# EAGLE board Sturingsschakeling_PCB_v5.0 (EAGLE 9.7.0)
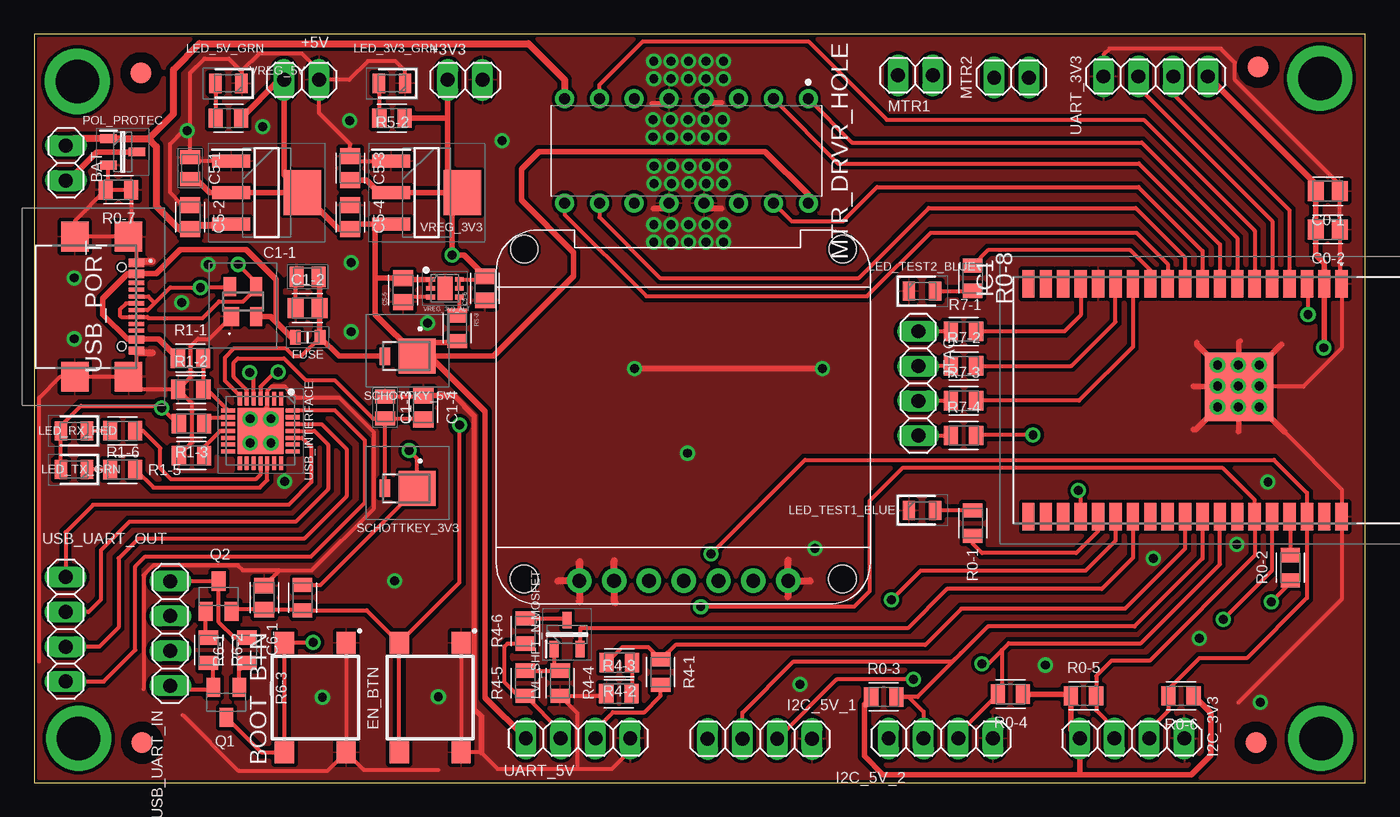
[diagram p0: board, top side]
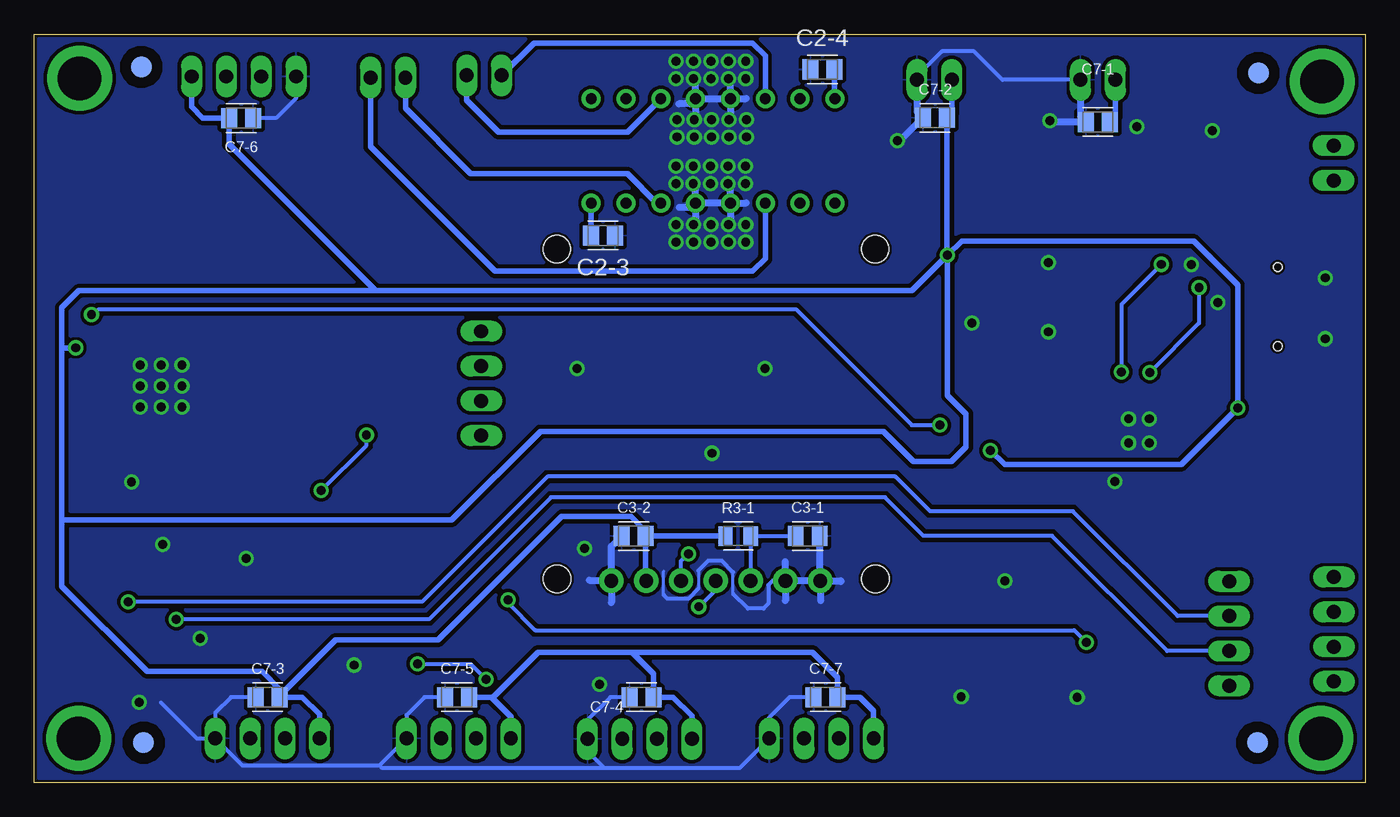
[diagram p1: board, bottom side, seen from below]

Size 97.14 x 54.64 mm. Coordinates in mm from the lower left corner, seen from the top.
Outline: 0,0 97.14,0 97.14,54.64 0,54.64 0,0
Copper layers (1*16): Top 0.035mm / dielectric 1.5mm / Bottom 0.035mm
Design rules "LPKF-S63_Design-Rules *": minimum track width 0.3mm, minimum drill 0.4mm, track to track 0.3mm, track to pad 0.25mm, pad to pad 0.25mm, via to via 0.25mm, smd to smd 0.25mm, copper to edge 0.2mm, drill to drill 0.3mm, minimum pad ring 0.1mm, minimum via ring 0.1mm, stop-mask expansion 4mil, vias tented up to drill 0mil, thermal gap 10mil

## Footprints (pad centres in the part's own frame; a part is rotated, then mirrored left to right if it is on the bottom)
1X02 = drill 1.016 long: 1 -1.27,0; 2 1.27,0
B3FS-1000P = smd 1.6 x 1.4: 1 4,-2.25; 2 -4,-2.25; 3 4,2.25; 4 -4,2.25
CAPC2012X110 = smd 1.165 x 1.465: 1 -0.875,0; 2 0.875,0
CAPC2012X145N = smd 1.02 x 1.47: 1 -0.8,0; 2 0.8,0
FID_060_P = smd 1.524 x 1.524 bottom: FIDB 0,0 | smd 1.524 x 1.524: FIDT 0,0
FUSC1608X100N = smd 0.77 x 1.07: 1 -0.9,0; 2 0.9,0
1X04 = drill 1.016 long: 1 -3.81,0; 2 -1.27,0; 3 1.27,0; 4 3.81,0
ESP32WROVER = smd 2 x 0.9: 1 -8.5,8.26; 2 -8.5,6.99; 3 -8.5,5.72; 4 -8.5,4.45; 5 -8.5,3.18; 6 -8.5,1.91; 7 -8.5,0.64; 8 -8.5,-0.63; 9 -8.5,-1.9; 10 -8.5,-3.17; 11 -8.5,-4.44; 12 -8.5,-5.71; 13 -8.5,-6.98; 14 -8.5,-8.25; 15 -8.5,-9.52; 16 -8.5,-10.79; 17 -8.5,-12.06; 18 -8.5,-13.33; 19 -8.5,-14.6; 20 8.5,-14.6; 21 8.5,-13.33; 22 8.5,-12.06; 23 8.5,-10.79; 24 8.5,-9.52; 25 8.5,-8.25; 26 8.5,-6.98; 27 8.5,-5.71; 28 8.5,-4.44; 29 8.5,-3.17; 30 8.5,-1.9; 31 8.5,-0.63; 32 8.5,0.64; 33 8.5,1.91; 34 8.5,3.18; 35 8.5,4.45; 36 8.5,5.72; 37 8.5,6.99; 38 8.5,8.26 | smd 5 x 5: 39 -1,0.76
LEDC2012X80N = smd 0.9 x 1.4: 1 -0.95,0; 2 0.95,0
SOT96P240X110-3N = smd 1.2 x 0.65: 1 -1.05,0.96; 2 -1.05,-0.96; 3 1.05,0
BEAGLEBONEBLACK_MOUNTING_HOLE = drill 3.175 pad 4.445: P$1 0,0
DIP762W53P254L1980H508Q16B = drill 0.789 pad 1.389: 1 -3.81,8.89; 2 -3.81,6.35; 3 -3.81,3.81; 4 -3.81,1.27; 5 -3.81,-1.27; 6 -3.81,-3.81; 7 -3.81,-6.35; 8 -3.81,-8.89; 9 3.81,-8.89; 10 3.81,-6.35; 11 3.81,-3.81; 12 3.81,-1.27; 13 3.81,1.27; 14 3.81,3.81; 15 3.81,6.35; 16 3.81,8.89
OLED096_SPI/I2C = drill 1 pad 1.778: CS/GND 22.5,26.87; D0/SCL 12.34,26.87; D1/SDA 14.88,26.87; DC/GND 19.96,26.87; GND 7.26,26.87; RES/RST 17.42,26.87; VCC 9.8,26.87 | hole 2: 3.275,2.66; 26.515,2.66; 26.54,26.722; 3.3,26.722
SOT23-BEC = smd 1 x 1.4: B -0.95,-1.1; C 0,1.1; E 0.95,-1.1
RESC2012X65 = smd 1.031 x 1.42: 1 -0.919,0; 2 0.919,0
SS1P3LM384A = smd 2.67 x 2.54: 1 0,0 | smd 0.762 x 1.27: 2 2.351,0
SP0503BAHTG = smd 1.1 x 1.4: 1 -0.85,-1.1 | smd 0.9 x 1.4: 2 0.95,-1.1; 3 0.95,1.1; 4 -0.95,1.1
QFN50P500X500X80-29N = smd 1 x 0.3: 1 -2.35,1.5; 2 -2.35,1; 3 -2.35,0.5; 4 -2.35,0; 5 -2.35,-0.5; 6 -2.35,-1; 7 -2.35,-1.5; 15 2.35,-1.5; 16 2.35,-1; 17 2.35,-0.5; 18 2.35,0; 19 2.35,0.5; 20 2.35,1; 21 2.35,1.5 | smd 0.3 x 1: 8 -1.5,-2.35; 9 -1,-2.35; 10 -0.5,-2.35; 11 0,-2.35; 12 0.5,-2.35; 13 1,-2.35; 14 1.5,-2.35; 22 1.5,2.35; 23 1,2.35; 24 0.5,2.35; 25 0,2.35; 26 -0.5,2.35; 27 -1,2.35; 28 -1.5,2.35 | smd 3.35 x 3.35: 29 0,0
USB4110GFA = smd 0.3 x 1.15: A1 -3.35,3.678; A4 -2.55,3.678; A5 -1.25,3.678; A6 -0.25,3.678; A7 0.25,3.678; A8 1.25,3.678; A9 2.55,3.678; A12 3.35,3.678; B1 3.05,3.678; B4 2.25,3.678; B5 1.75,3.678; B6 0.75,3.678; B7 -0.75,3.678; B8 -1.75,3.678; B9 -2.25,3.678; B12 -3.05,3.678 | smd 2.18 x 2: MP1 -5.11,-0.827; MP2 5.11,-0.827; MP3 -5.11,3.103; MP4 5.11,3.103 | hole 0.65: -2.89,2.603; 2.89,2.603
SOT230P700X180-4N = smd 2.75 x 0.95: 1 -2.6,2.3; 2 -2.6,0; 3 -2.6,-2.3 | smd 2.75 x 3.25: 4 2.6,0
SON65P200X200X80-7N = smd 0.65 x 0.35: 1 -1.05,0.65; 2 -1.05,0; 3 -1.05,-0.65; 4 1.05,-0.65; 5 1.05,0; 6 1.05,0.65 | smd 1.1 x 1.7: 7 0,0

## Placement (x,y rotation side)
+3V3  PINHD-1X2  [1X02]  31.45,51.31 0 top
+5V  PINHD-1X2  [1X02]  19.51,51.31 0 top
BAT  PINHD-1X2  [1X02]  2.31,45.24 270 top
BOOT_BTN  B3FS-1000P  [B3FS-1000P]  20.51,6.22 90 top
C0-1  22uF  [CAPC2012X110]  94.41,43.18 180 top
C0-2  100nF  [CAPC2012X110]  94.41,40.39 180 top
C1-1  4.7uF_16V  [CAPC2012X145N]  19.94,36.93 0 top
C1-2  100nF  [CAPC2012X110]  19.94,34.65 0 top
C1-3  4.7uF_16V  [CAPC2012X145N]  25.6,27.38 270 top
C1-4  100nF  [CAPC2012X110]  28.4,27.38 270 top
C2-3  100nF  [CAPC2012X110]  55.63,39.95 180 bottom
C2-4  1uF  [CAPC2012X110]  39.62,52.07 0 bottom
C3-1  100nF  [CAPC2012X110]  40.69,18.01 0 bottom
C3-2  100nF  [CAPC2012X110]  53.39,18.01 0 bottom
C5-1  4.7uF_16V  [CAPC2012X145N]  11.38,44.86 270 top
C5-2  1uF  [CAPC2012X110]  11.38,41.3 270 top
C5-3  4.7uF  [CAPC2012X110]  23.06,44.86 270 top
C5-4  1uF  [CAPC2012X110]  23.06,41.3 270 top
C5-5  1uF  [CAPC2012X110]  26.92,35.97 90 top
C5-6  10uF  [CAPC2012X110]  32.89,36.09 90 top
C6-1  1uF  [CAPC2012X110]  16.79,13.51 270 top
C7-1  1uF  [CAPC2012X110]  19.51,48.23 0 bottom
C7-2  1uF  [CAPC2012X110]  31.39,48.54 0 bottom
C7-3  1uF  [CAPC2012X110]  80.09,6.25 0 bottom
C7-4  1uF  [CAPC2012X110]  52.83,6.25 0 bottom
C7-5  1uF  [CAPC2012X110]  66.29,6.25 0 bottom
C7-6  1uF  [CAPC2012X110]  82.04,48.51 180 bottom
C7-7  1uF  [CAPC2012X110]  39.38,6.25 0 bottom
EN_BTN  B3FS-1000P  [B3FS-1000P]  28.89,6.22 90 top
FD1  FID_60MIL_P  [FID_060_P]  7.8,51.82 0 top
FD2  FID_60MIL_P  [FID_060_P]  89.33,52.25 0 top
FD3  FID_60MIL_P  [FID_060_P]  89.15,2.92 0 top
FD4  FID_60MIL_P  [FID_060_P]  7.87,2.92 0 top
FUSE  MF-FSMF050X-2  [FUSC1608X100N]  19.96,32.51 180 top
I2C_3V3  PINHD-1X4  [1X04]  80.11,3.23 0 top
I2C_5V_1  PINHD-1X4  [1X04]  52.96,3.2 0 top
I2C_5V_2  PINHD-1X4  [1X04]  66.17,3.23 0 top
IC1  ESP32-WROVER  [ESP32WROVER]  87.16,27.92 270 top
JTAG  PINHD-1X4  [1X04]  64.52,29.15 270 top
LED_3V3_GRN  150080RS75000  [LEDC2012X80N]  26.11,51.05 180 top
LED_5V_GRN  150080RS75000  [LEDC2012X80N]  14.17,51.05 180 top
LED_RX_RED  150080RS75000  [LEDC2012X80N]  2.9,25.68 180 top
LED_TEST1_BLUE  150080RS75000  [LEDC2012X80N]  64.79,19.89 0 top
LED_TEST2_BLUE  150080RS75000  [LEDC2012X80N]  64.79,35.89 0 top
LED_TX_GRN  150080RS75000  [LEDC2012X80N]  2.9,22.87 180 top
LVL_SHFT_N-MOSFET  DMG3414U  [SOT96P240X110-3N]  38.89,10.82 90 top
MGT1  BEAGLEBONEBLACK_MOUNTING_HOLE  [BEAGLEBONEBLACK_MOUNTING_HOLE]  3.14,51.2 0 top
MGT2  BEAGLEBONEBLACK_MOUNTING_HOLE  [BEAGLEBONEBLACK_MOUNTING_HOLE]  93.9,3.24 0 top
MGT3  BEAGLEBONEBLACK_MOUNTING_HOLE  [BEAGLEBONEBLACK_MOUNTING_HOLE]  3.24,3.24 0 top
MGT4  BEAGLEBONEBLACK_MOUNTING_HOLE  [BEAGLEBONEBLACK_MOUNTING_HOLE]  93.83,51.43 0 top
MTR1  PINHD-1X2  [1X02]  64.31,51.64 180 top
MTR2  PINHD-1X2  [1X02]  71.32,51.48 180 top
MTR_DRVR_HOLE  SN754410  [DIP762W53P254L1980H508Q16B]  47.6,46.13 270 top
OLED  OLED096_SPI/I2C  [OLED096_SPI/I2C]  62.28,41.61 180 top
POL_PROTEC  DMG3414U  [SOT96P240X110-3N]  6.45,46.05 0 top
Q1  BC817-16SMD  [SOT23-BEC]  14.02,5.87 180 top
Q2  BC817-16SMD  [SOT23-BEC]  13.46,13.61 0 top
R0-1  1kΩ  [RESC2012X65]  68.49,18.95 270 top
R0-2  499Ω  [RESC2012X65]  91.67,15.7 90 top
R0-3  4k7Ω  [RESC2012X65]  62,6.27 0 top
R0-4  4k7Ω  [RESC2012X65]  71.25,6.47 180 top
R0-5  2k4Ω  [RESC2012X65]  76.58,6.34 0 top
R0-6  2k4Ω  [RESC2012X65]  83.69,6.34 180 top
R0-7  1kΩ  [RESC2012X65]  6.14,43.28 180 top
R0-8  1kΩ  [RESC2012X65]  68.49,36.83 270 top
R1-1  22k1Ω  [RESC2012X65]  11.4,30.99 0 top
R1-2  47k5Ω  [RESC2012X65]  11.43,28.71 0 top
R1-3  1kΩ  [RESC2012X65]  11.48,26.22 180 top
R1-4  10kΩ  [RESC2012X65]  11.48,23.88 0 top
R1-5  1kΩ  [RESC2012X65]  6.45,22.87 0 top
R1-6  1kΩ  [RESC2012X65]  6.45,25.68 0 top
R3-1  10kΩ  [RESC2012X65]  45.77,18.01 0 bottom
R4-1  1kΩ  [RESC2012X65]  45.72,8.08 270 top
R4-2  1kΩ  [RESC2012X65]  42.7,8.77 180 top
R4-3  1kΩ  [RESC2012X65]  42.67,6.5 0 top
R4-4  10kΩ  [RESC2012X65]  38.38,7.26 270 top
R4-5  4k7Ω  [RESC2012X65]  35.84,7.26 90 top
R4-6  10kΩ  [RESC2012X65]  35.84,11.07 90 top
R5-1  1kΩ  [RESC2012X65]  14.17,48.51 180 top
R5-2  1kΩ  [RESC2012X65]  26.11,48.51 180 top
R5-3  100kΩ  [RESC2012X65]  30.86,33.17 270 top
R6-1  10kΩ  [RESC2012X65]  15.52,9.68 90 top
R6-2  10kΩ  [RESC2012X65]  12.73,9.68 270 top
R6-3  10kΩ  [RESC2012X65]  19.58,13.51 90 top
R7-1  100Ω  [RESC2012X65]  67.83,32.94 0 top
R7-2  100Ω  [RESC2012X65]  67.83,30.42 0 top
R7-3  100Ω  [RESC2012X65]  67.83,27.89 0 top
R7-4  100Ω  [RESC2012X65]  67.83,25.35 0 top
SCHOTTKEY_3V3  SS1P3L-M3_84A  [SS1P3LM384A]  27.94,21.49 180 top
SCHOTTKY_5V  SS1P3L-M3_84A  [SS1P3LM384A]  27.94,31.14 180 top
TVS_DIODE_ESD_P  SP0503BAHTG  [SP0503BAHTG]  15.24,35.13 0 top
UART_3V3  PINHD-1X4  [1X04]  81.85,51.56 180 top
UART_5V  PINHD-1X4  [1X04]  39.69,3.23 0 top
USB_INTERFACE  CP2102N-A02-GQFN28R  [QFN50P500X500X80-29N]  16.51,25.68 270 top
USB_PORT  USB4110-GF-A  [USB4110GFA]  3.78,34.75 270 top
USB_UART_IN  PINHD-1X4  [1X04]  9.93,10.9 90 top
USB_UART_OUT  PINHD-1X4  [1X04]  2.29,11.2 270 top
VREG_3V3  LDL1117S33R  [SOT230P700X180-4N]  28.65,43.08 0 top
VREG_3V3_ALT  NCP187AMT330TAG  [SON65P200X200X80-7N]  29.97,36.09 0 top
VREG_5V  LDL1117S50R  [SOT230P700X180-4N]  16.97,43.08 0 top

## Library data of the parts
+3V3 +5V BAT I2C_3V3 I2C_5V_1 I2C_5V_2 JTAG MTR1 MTR2 UART_3V3 UART_5V USB_UART_IN USB_UART_OUT = Connector; CATEGORY: CONNECTOR; SUB-CATEGORY: PIN-HEADER
BOOT_BTN EN_BTN = B3FS-1000P; ARROW_PART_NUMBER: B3FS-1000P; ARROW_PRICE-STOCK: https://www.arrow.com/en/products/b3fs-1000p/omron?region=nac; DESCRIPTION: Switch Tact,6x6mm,flat act,gen purp,tape Plunger Tactile Switch, SPST-NO 0.05 A@ 24 V dc 0.5mm; HEIGHT: mm; MANUFACTURER_NAME: Omron Electronics; MANUFACTURER_PART_NUMBER: B3FS-1000P; MOUSER_PART_NUMBER: 653-B3FS-1000P; MOUSER_PRICE-STOCK: https://www.mouser.co.uk/ProductDetail/Omron-Electronics/B3FS-1000P?qs=ImaqFqjHA4k6odVF2%2FXWpQ%3D%3D
C0-1 C0-2 C1-2 C1-4 C2-3 C2-4 C3-1 C3-2 C5-2-C5-6 C6-1 C7-1-C7-7 = Capacitor; CATEGORY: Capacitor
C1-1 C1-3 C5-1 = CC0805ZKY5V7BB475; ARROW_PART_NUMBER: CC0805ZKY5V7BB475; ARROW_PRICE-STOCK: https://www.arrow.com/en/products/cc0805zky5v7bb475/yageo; DESCRIPTION: YAGEO - CC0805ZKY5V7BB475 - SMD Multilayer Ceramic Capacitor, 4.7 F, 16 V, 0805 [2012 Metric], +80%, -20%, Y5V, CC Series; HEIGHT: 1.45mm; MANUFACTURER_NAME: KEMET; MANUFACTURER_PART_NUMBER: CC0805ZKY5V7BB475; MOUSER_PART_NUMBER: 603-CC805ZKY5V7BB475; MOUSER_PRICE-STOCK: https://www.mouser.co.uk/ProductDetail/Yageo/CC0805ZKY5V7BB475?qs=7s%252B3O6pAiyA4wtTM471wUA%3D%3D
FD1-FD4 = Fiducial
FUSE = MF-FSMF050X-2; ARROW_PART_NUMBER: MF-FSMF050X-2; ARROW_PRICE-STOCK: https://www.arrow.com/en/products/mf-fsmf050x-2/bourns?region=nac; DESCRIPTION: 0603 PTC Resettable Fuses, 6V, 500mA Bourns 0.5A Surface Mount Resettable Fuse, 6 V; HEIGHT: 1mm; MANUFACTURER_NAME: Bourns; MANUFACTURER_PART_NUMBER: MF-FSMF050X-2; MOUSER_PART_NUMBER: 652-MFFSMF050X-2; MOUSER_PRICE-STOCK: https://www.mouser.co.uk/ProductDetail/Bourns/MF-FSMF050X-2?qs=3QkGRBNOvbrZekaW8Gqm4A%3D%3D
IC1 = ESP32-WROVER; DESCRIPTION: WiFi Modules (802.11) SMD Module, ESP32-D0WDQ6, 64Mbits PSRAM, 32Mbits SPI flash, PCB Antenna; HEIGHT: 3mm; MANUFACTURER_NAME: Espressif Systems; MANUFACTURER_PART_NUMBER: ESP32-WROVER; MOUSER_PART_NUMBER: 356-ESP32-WROVER
LED_3V3_GRN LED_5V_GRN LED_RX_RED LED_TEST1_BLUE LED_TEST2_BLUE LED_TX_GRN = 150080RS75000; DESCRIPTION: LED,Wurth Elektronik,150080RS75000 Wurth Elektronik 150080RS75000, WL-SMCW Series Red LED, 625 nm 2012 (0805) Clear, Rectangle Lens SMD package; HEIGHT: 0.8mm; MANUFACTURER_NAME: Wurth Elektronik; MANUFACTURER_PART_NUMBER: 150080RS75000; MOUSER_PART_NUMBER: 710-150080RS75000; MOUSER_PRICE-STOCK: https://www.mouser.co.uk/ProductDetail/Wurth-Elektronik/150080RS75000?qs=LlUlMxKIyB2jdCo7bnfgew%3D%3D
LVL_SHFT_N-MOSFET POL_PROTEC = DMG3414U; DESCRIPTION: DIODES INC. - DMG3414U - MOSFET, N CH, W DIODE, 20V, 4.2A, SOT23; HEIGHT: 1.1mm; MANUFACTURER_NAME: Diodes Inc.; MANUFACTURER_PART_NUMBER: DMG3414U; MOUSER_PART_NUMBER: N/A; MOUSER_PRICE-STOCK: https://www.mouser.co.uk/ProductDetail/Diodes-Incorporated/DMG3414U?qs=Ledwo0gu0jiKJ4xsXSUnyQ%3D%3D
MGT1-MGT4 = BeagleBone_Black_Wireless
MTR_DRVR_HOLE = IC_Power-Management; CATEGORY: IC_Power-Management; DESCRIPTION: Quadruple Half-H Driver; MANUFACTURER: TEXAS INSTRUMENTS; MPN: SN754410; OPERATING_TEMP: -40°C to 150°C (TJ); PART_STATUS: Active; ROHS_COMPLIANT: ROHS3 Compliant; SERIES: SN754; SUB_CATEGORY: Motor Driver
OLED = OLED096
Q1 Q2 = transistor-npn
R0-1-R0-8 R1-1-R1-6 R3-1 R4-1-R4-6 R5-1-R5-3 R6-1-R6-3 R7-1-R7-4 = Resistor; CATEGORY: Resistor; SUB-CATEGORY: Fixed
SCHOTTKEY_3V3 SCHOTTKY_5V = SS1P3L-M3_84A; ARROW_PART_NUMBER: SS1P3L-M3/84A; ARROW_PRICE-STOCK: https://www.arrow.com/en/products/ss1p3l-m384a/vishay?region=nac; DESCRIPTION: Schottky Diodes & Rectifiers 30volt 1.0amp Low VF High Current Density Surface Mount Schottky Barrier Rectifiers; HEIGHT: 1.15mm; MANUFACTURER_NAME: Vishay; MANUFACTURER_PART_NUMBER: SS1P3L-M3/84A; MOUSER_PART_NUMBER: 625-SS1P3L-M3/84A; MOUSER_PRICE-STOCK: https://www.mouser.co.uk/ProductDetail/Vishay-General-Semiconductor/SS1P3L-M3-84A?qs=HSPD0Bff7iZtYrbeCvAZDQ%3D%3D
TVS_DIODE_ESD_P = SP0503BAHTG; ARROW_PART_NUMBER: SP0503BAHTG; ARROW_PRICE-STOCK: https://www.arrow.com/en/products/sp0503bahtg/littelfuse?region=europe; DESCRIPTION: ESD Suppressors / TVS Diodes TVS AVAL DIODE SMT; HEIGHT: 1.22mm; MANUFACTURER_NAME: LITTELFUSE; MANUFACTURER_PART_NUMBER: SP0503BAHTG; MOUSER_PART_NUMBER: 576-SP0503BAHTG; MOUSER_PRICE-STOCK: https://www.mouser.co.uk/ProductDetail/Littelfuse/SP0503BAHTG?qs=uD%2FdkN7XIa0NTYXwHdELYA%3D%3D
USB_INTERFACE = CP2102N-A02-GQFN28R; ARROW_PART_NUMBER: CP2102N-A02-GQFN28R; ARROW_PRICE-STOCK: https://www.arrow.com/en/products/cp2102n-a02-gqfn28r/silicon-labs?region=nac; DESCRIPTION: USB Interface IC USB to UART bridge - QFN28; HEIGHT: 0.8mm; MANUFACTURER_NAME: Silicon Labs; MANUFACTURER_PART_NUMBER: CP2102N-A02-GQFN28R; MOUSER_PART_NUMBER: 634-CP2102NA02QFN28R; MOUSER_PRICE-STOCK: https://www.mouser.co.uk/ProductDetail/Silicon-Labs/CP2102N-A02-GQFN28R?qs=u16ybLDytRag4qKvSH3fTw%3D%3D
USB_PORT = USB4110-GF-A; DESCRIPTION: CONN USB 2.0 TYPE-C R/A SMT; HEIGHT: 3.26mm; MANUFACTURER_NAME: GCT (GLOBAL CONNECTOR TECHNOLOGY); MANUFACTURER_PART_NUMBER: USB4110-GF-A; MOUSER_PART_NUMBER: 640-USB4110-GF-A; MOUSER_PRICE-STOCK: https://www.mouser.co.uk/ProductDetail/GCT/USB4110-GF-A?qs=KUoIvG%2F9IlYiZvIXQjyJeA%3D%3D
VREG_3V3 = LDL1117S33R; ARROW_PART_NUMBER: LDL1117S33R; ARROW_PRICE-STOCK: https://www.arrow.com/en/products/ldl1117s33r/stmicroelectronics?region=nac; DESCRIPTION: STMICROELECTRONICS - LDL1117S33R - LDO, FIXED, 3.3V, 1.2A, SOT-223-3; HEIGHT: 1.8mm; MANUFACTURER_NAME: STMicroelectronics; MANUFACTURER_PART_NUMBER: LDL1117S33R; MOUSER_PART_NUMBER: 511-LDL1117S33R; MOUSER_PRICE-STOCK: https://www.mouser.co.uk/ProductDetail/STMicroelectronics/LDL1117S33R?qs=AQlKX63v8Rt9Bf6AWSrbFg%3D%3D
VREG_3V3_ALT = NCP187AMT330TAG; ARROW_PART_NUMBER: NCP187AMT330TAG; ARROW_PRICE-STOCK: https://www.arrow.com/en/products/ncp187amt330tag/on-semiconductor?region=nac; DESCRIPTION: LDO Voltage Regulators 1.2A 3.3V Active discharge; HEIGHT: 0.8mm; MANUFACTURER_NAME: onsemi; MANUFACTURER_PART_NUMBER: NCP187AMT330TAG; MOUSER_PART_NUMBER: 863-NCP187AMT330TAG; MOUSER_PRICE-STOCK: https://www.mouser.co.uk/ProductDetail/ON-Semiconductor/NCP187AMT330TAG?qs=%252B6g0mu59x7JOII%252BWk4iw4Q%3D%3D
VREG_5V = LDL1117S50R; ARROW_PART_NUMBER: LDL1117S50R; ARROW_PRICE-STOCK: https://www.arrow.com/en/products/ldl1117s50r/stmicroelectronics?region=nac; DESCRIPTION: STMICROELECTRONICS - LDL1117S50R - LDO, FIXED, 5V, 1.2A, SOT-223-3; HEIGHT: 1.8mm; MANUFACTURER_NAME: STMicroelectronics; MANUFACTURER_PART_NUMBER: LDL1117S50R; MOUSER_PART_NUMBER: 511-LDL1117S50R; MOUSER_PRICE-STOCK: https://www.mouser.co.uk/ProductDetail/STMicroelectronics/LDL1117S50R?qs=AQlKX63v8RsuN9BQFiVf%2Fg%3D%3D

## Nets
3V3_USB: C1-3.2 C1-4.2 SCHOTTKEY_3V3.2 USB_INTERFACE.6
5V_OUT: LVL_SHFT_N-MOSFET.3 R4-6.2
5V_USB: C1-1.2 C1-2.2 FUSE.1 SCHOTTKY_5V.2 USB_INTERFACE.7
+3.3V: +3V3.1 C0-1.2 C0-2.2 C3-2.2 C5-3.2 C5-6.2 C7-2.2 C7-3.2 C7-6.2 I2C_3V3.1 IC1.2 LED_RX_RED.2 LED_TX_GRN.2 OLED.VCC R0-3.1 R0-4.1 R0-5.1 R0-6.1 R1-3.2 R3-1.1 R5-2.1 R6-3.2 SCHOTTKEY_3V3.1 UART_3V3.1 VREG_3V3.2 VREG_3V3.4 VREG_3V3_ALT.5 VREG_3V3_ALT.6
+5V: +5V.1 C2-3.2 C5-1.2 C5-4.2 C5-5.2 C7-1.2 C7-4.2 C7-5.2 C7-7.2 I2C_5V_1.1 I2C_5V_2.1 MTR_DRVR_HOLE.16 R5-1.1 R5-3.2 SCHOTTKY_5V.1 UART_5V.1 VREG_3V3.3 VREG_3V3_ALT.1 VREG_3V3_ALT.2 VREG_5V.2 VREG_5V.4
BOOT: BOOT_BTN.3 BOOT_BTN.4 IC1.25 Q1.C
D+: TVS_DIODE_ESD_P.3 USB_INTERFACE.4 USB_PORT.A6 USB_PORT.B6
D-: TVS_DIODE_ESD_P.4 USB_INTERFACE.5 USB_PORT.A7 USB_PORT.B7
DTR_IN: Q1.E R6-2.2 USB_UART_IN.1
DTR_OUT: USB_INTERFACE.28 USB_UART_OUT.4
EN: C6-1.2 EN_BTN.3 EN_BTN.4 IC1.3 Q2.E R6-3.1
GND: +3V3.2 +5V.2 BOOT_BTN.1 BOOT_BTN.2 C0-1.1 C0-2.1 C1-1.1 C1-2.1 C1-3.1 C1-4.1 C2-3.1 C2-4.1 C3-1.2 C3-2.1 C5-1.1 C5-2.1 C5-3.1 C5-4.1 C5-5.1 C5-6.1 C6-1.1 C7-1.1 C7-2.1 C7-3.1 C7-4.1 C7-5.1 C7-6.1 C7-7.1 EN_BTN.1 EN_BTN.2 I2C_3V3.4 I2C_5V_1.4 I2C_5V_2.4 IC1.1 IC1.15 IC1.38 IC1.39 LED_3V3_GRN.1 LED_5V_GRN.1 LED_TEST1_BLUE.1 LED_TEST2_BLUE.1 MTR_DRVR_HOLE.4 MTR_DRVR_HOLE.5 MTR_DRVR_HOLE.12 MTR_DRVR_HOLE.13 OLED.CS/GND OLED.DC/GND OLED.GND POL_PROTEC.2 R0-7.1 R0-7.2 R1-2.1 R1-4.1 R4-3.1 R4-4.2 TVS_DIODE_ESD_P.1 UART_3V3.4 UART_5V.4 USB_INTERFACE.3 USB_INTERFACE.29 USB_PORT.A1 USB_PORT.A12 USB_PORT.B1 USB_PORT.B12 USB_PORT.MP1 USB_PORT.MP2 USB_PORT.MP3 USB_PORT.MP4 VREG_3V3.1 VREG_3V3_ALT.3 VREG_3V3_ALT.7 VREG_5V.1
GND_BAT: BAT.2 POL_PROTEC.3
LED_RX: R1-6.2 USB_INTERFACE.18
LED_TEST: IC1.24 R0-1.2
LED_TX: R1-5.2 USB_INTERFACE.19
MTCK: IC1.16 R7-1.2
MTDI: IC1.14 R7-2.2
MTDO: IC1.23 R7-4.2
MTMS: IC1.13 R7-3.2
MTR1_1,2EN: IC1.7 MTR_DRVR_HOLE.1
MTR1_1A: IC1.8 MTR_DRVR_HOLE.2
MTR1_2A: IC1.6 MTR_DRVR_HOLE.7
MTR1_OUT1Y: MTR1.1 MTR_DRVR_HOLE.3
MTR1_OUT2Y: MTR1.2 MTR_DRVR_HOLE.6
MTR2_3,4EN: IC1.11 MTR_DRVR_HOLE.9
MTR2_3A: IC1.10 MTR_DRVR_HOLE.10
MTR2_4A: IC1.9 MTR_DRVR_HOLE.15
MTR2_OUT3Y: MTR2.1 MTR_DRVR_HOLE.11
MTR2_OUT4Y: MTR2.2 MTR_DRVR_HOLE.14
N$2: IC1.12 R0-8.1
N$3: LED_TEST2_BLUE.2 R0-8.2
N$6: JTAG.1 R7-1.1
N$7: LED_3V3_GRN.2 R5-2.2
N$8: LED_5V_GRN.2 R5-1.2
N$10: LED_TEST1_BLUE.2 R0-1.1
N$11: JTAG.2 R7-2.1
N$13: R5-3.1 VREG_3V3_ALT.4
N$14: JTAG.3 R7-3.1
N$15: JTAG.4 R7-4.1
N$18: Q1.B R6-1.1
N$19: Q2.B R6-2.1
N$34: LVL_SHFT_N-MOSFET.1 R4-4.1 R4-5.2
N$35: R4-2.1 R4-3.2
N$38: IC1.35 R0-2.2
N$40: LED_TX_GRN.1 R1-5.1
N$41: LED_RX_RED.1 R1-6.1
RES: C3-1.1 OLED.RES/RST R3-1.2
RSTB: R1-3.1 USB_INTERFACE.9
RTS_IN: Q2.C R6-1.2 USB_UART_IN.4
RTS_OUT: USB_INTERFACE.24 USB_UART_OUT.1
RX_3V3: IC1.4 UART_3V3.2
RX_5V_A: IC1.26 LVL_SHFT_N-MOSFET.2
RX_5V_B: R4-1.2 UART_5V.3
RX_USB: USB_INTERFACE.26 USB_UART_OUT.3
RX_USB_IN: IC1.34 USB_UART_IN.2
SCL_3V3: I2C_3V3.3 IC1.36 OLED.D0/SCL R0-6.2
SCL_5V: I2C_5V_1.3 I2C_5V_2.3 IC1.31 R0-4.2
SDA_3V3: I2C_3V3.2 IC1.33 OLED.D1/SDA R0-5.2
SDA_5V: I2C_5V_1.2 I2C_5V_2.2 IC1.30 R0-3.2
SUSPENDB: R1-4.2 USB_INTERFACE.11
TX_3V3: IC1.5 UART_3V3.3
TX_5V_A: IC1.29 R4-1.1 R4-2.2
TX_5V_B: R4-5.1 R4-6.1 UART_5V.2
TX_USB: USB_INTERFACE.25 USB_UART_OUT.2
TX_USB_IN: R0-2.1 USB_UART_IN.3
V_BAT: BAT.1 C2-4.2 C5-2.2 MTR_DRVR_HOLE.8 POL_PROTEC.1 VREG_5V.3
VBUS_INT: R1-1.2 R1-2.2 USB_INTERFACE.8
VBUS_USB: FUSE.2 R1-1.1 TVS_DIODE_ESD_P.2 USB_PORT.A4 USB_PORT.A9 USB_PORT.B4 USB_PORT.B9

## Tracks (layer width: path | path; a pad name or v marks a point on that pad's centre or on a via)
3V3_USB
  Top 0.3: SCHOTTKEY_3V3.2 25.6,21.5 C1-3.2 | C1-3.2 28.32,26.58 C1-4.2 | USB_INTERFACE.6 15.51,28.67 14.55,29.62 14.55,30.68 14.85,30.98 18.22,30.98 19.81,29.39 21.92,29.39 24.73,26.58 C1-3.2
5V_OUT
  Top 0.3: R4-6.2 38.76,11.99 LVL_SHFT_N-MOSFET.3
5V_USB
  Top 0.3: USB_INTERFACE.7 15.01,28.25 13.92,29.34 13.92,31.04 14.61,31.73 18.34,31.73 18.92,31.14 19.49,31.14 FUSE.1 | 20.81,36.86 C1-1.2
  Top 0.406: SCHOTTKY_5V.2 22.24,31.14 FUSE.1 20.81,32.56 C1-2.2 20.81,36.86
+3.3V  (via drill 0.65 pad 1.1)
  Top 0.3: 25.16,43.08 VREG_3V3.2 | R1-3.2 10.43,26.22 v9.3,27.35 v9.3,27.36 9.14,27.51 3.4,27.51 1.95,26.05 LED_RX_RED.2 LED_TX_GRN.2 | R6-3.2 20.88,14.43 SCHOTTKEY_3V3.1 27.94,23.67 v27.36,24.26
  Top 0.305: C5-6.2 32.67,36.74 VREG_3V3_ALT.6 VREG_3V3_ALT.5
  Top 0.406: UART_3V3.1 93.54,43.69 C0-1.2 C0-2.2 93.54,38.54 94.15,37.93 IC1.2 94.15,31.79 v94.11,31.75 | R0-4.1 75.53,6.47 R0-5.1 75.66,3.87 I2C_3V3.1 76.3,0.58 | R0-3.1 61.08,6.24 60.58,5.74 60.58,1.96 61.95,0.58 76.3,0.58 | 76.3,0.58 84.43,0.58 85.85,2.01 85.85,5.1 R0-6.1 | C5-3.2 24.26,43.98 25.16,43.08 | 30.18,44.15 30.18,48.51 | 30.18,48.51 +3V3.1 | R5-2.1 30.18,48.51 | 30.48,42.31 30.48,42.22 | 30.48,42.22 v30.48,38.51 31.36,38.51 C5-6.2 | 30.48,42.22 31.25,42.99 VREG_3V3.4 VREG_3V3.2
  Bottom 0.3: 79.22,6.83 79.22,6.35 C7-3.2 | 9.32,27.38 v9.3,27.36 | OLED.VCC 52.52,14.77
  Bottom 0.406: C3-2.2 52.52,14.77 | R3-1.1 C3-2.2 | C7-3.2 77.57,6.25 76.3,4.98 I2C_3V3.1 | +3V3.1 30.18,48.88 C7-2.2 30.52,38.55 v30.48,38.51 | 9.32,27.38 9.32,36.34 12.53,39.55 29.44,39.55 v30.48,38.51 | C3-2.2 52.52,18.35 53.59,19.43 58.64,19.43 67.66,10.41 75.15,10.41 79.22,6.35 | v27.36,24.26 26.31,23.22 13.44,23.22 v9.3,27.36 | 95.12,19.18 95.12,14.35 88.9,8.13 80.52,8.13 79.22,6.83 | 95.12,19.18 95.12,31.75 | 95.12,31.75 95.12,34.67 93.88,35.91 72.23,35.91 | UART_3V3.1 85.66,49.34 84.84,48.51 C7-6.2 82.93,46.61 72.23,35.91 | v30.48,38.51 33.08,35.91 72.23,35.91 | v94.11,31.75 95.12,31.75 | v30.48,38.51 30.48,28.27 29.13,26.92 29.13,24.51 30.2,23.44 32.97,23.44 35.18,25.65 60.2,25.65 66.67,19.18 95.12,19.18
+5V
  Top 0.3: C5-4.2 23.42,40.78
  Top 0.305: VREG_3V3_ALT.2 VREG_3V3_ALT.1
  Top 0.406: C5-1.2 11.82,44.06 12.8,43.08 VREG_5V.2 VREG_5V.4 | C5-4.2 22.22,40.42 VREG_5V.4 | 23.42,40.78 VREG_3V3.3 25.29,40.78 24.89,40.38 24.89,36.83 | R5-1.1 17.89,51.31 +5V.1 18.24,44.41 VREG_5V.4 | UART_5V.1 32.91,6.2 32.91,27.08 28.86,31.14 SCHOTTKY_5V.1 | 24.89,36.83 24.89,34.19 SCHOTTKY_5V.1 | MTR_DRVR_HOLE.16 56.49,42.93 53.34,46.08 36.83,46.08 35.56,44.81 35.56,42.52 39.37,38.71 39.37,36.98 33.53,31.14 SCHOTTKY_5V.1 | R5-3.2 30.73,32.13 28.93,32.13 SCHOTTKY_5V.1 | VREG_3V3_ALT.1 27.02,36.74 C5-5.2 24.89,36.83
  Bottom 0.406: I2C_5V_2.1 62.36,4.83 63.78,6.25 C7-5.2 63.66,6.25 60.38,9.53 53.52,9.53 | I2C_5V_1.1 49.15,4.87 50.52,6.25 C7-4.2 51.96,7.96 53.52,9.53 | 53.52,9.53 40.34,9.53 38.5,7.69 C7-7.2 36.88,6.25 35.88,5.25 UART_5V.1 | +5V.1 18.24,48.63 C7-1.2 | MTR_DRVR_HOLE.16 56.5,42.3 C2-3.2
BOOT  (via drill 0.65 pad 1.1)
  Top 0.3: Q1.C 16.57,2.22 BOOT_BTN.4 BOOT_BTN.3 18.27,10.24 v20.34,10.24 | v62.57,13.35 64.68,15.47 76.72,15.47 78.91,17.66 IC1.25
  Bottom 0.3: v20.34,10.24 21.23,11.12 60.58,11.12 62.57,13.11 v62.57,13.35
D+  (via drill 0.65 pad 1.1)
  Top 0.3: USB_INTERFACE.4 16.51,28.91 17.59,29.99 v17.8,29.99 | USB_PORT.A6 6.7,35 6.25,34.54 6.25,34.09 6.34,34 USB_PORT.B6 8.25,34 8.35,33.9 12.26,33.9 13.49,35.13 15.24,35.13 16.19,36.08 TVS_DIODE_ESD_P.3 16.19,36.52 v14.87,37.84
  Bottom 0.3: v14.87,37.84 17.8,34.91 v17.8,29.99
D-  (via drill 0.65 pad 1.1)
  Top 0.3: USB_INTERFACE.5 16.01,29.67 v15.72,29.95 | USB_PORT.B7 8.32,35.5 8.79,35.02 | USB_PORT.A7 8.27,34.5 8.79,35.02 | 8.79,35.02 9.93,36.15 v12.13,36.15 14.21,36.15 TVS_DIODE_ESD_P.4
  Bottom 0.3: v12.13,36.15 12.13,33.55 v15.72,29.95
DTR_IN
  Top 0.3: USB_UART_IN.1 9.93,6.78 12.89,6.78 Q1.E 13.07,8.41 R6-2.2
DTR_OUT
  Top 0.3: USB_UART_OUT.4 5.08,7.39 7.38,9.69 7.38,15.79 8.1,16.51 20.19,16.51 24.13,20.45 24.13,24.99 21.94,27.18 USB_INTERFACE.28
EN  (via drill 0.65 pad 1.1)
  Top 0.3: IC1.3 92.96,36.34 v92.96,34.16 | EN_BTN.4 EN_BTN.3 | EN_BTN.3 24.27,12.59 R6-3.1 19.54,12.64 C6-1.2 14.54,12.64 Q2.E | EN_BTN.3 31.04,14.62 v31.04,26.11
  Bottom 0.3: v92.96,34.16 92.84,34.16 92.43,34.57 41.55,34.57 33.1,26.11 v31.04,26.11
GND  (via drill 0.65 pad 1.1)
  Top 0.3: C0-1.1 C0-2.1 95.29,36.55 IC1.1 95.42,31.72 92.62,28.92 IC1.39 | LED_TEST1_BLUE.1 63.66,20.07 | 41.5,6.5 R4-3.1 41.59,6.34 R4-4.2 39.62,5.1 39.62,1.02 | 32.59,2.22 EN_BTN.2 | 31.45,10.22 EN_BTN.1 EN_BTN.2 | BOOT_BTN.1 BOOT_BTN.2 | R1-2.1 7.82,28.71 USB_PORT.MP4 | R0-7.2 R0-7.1 7.06,40.03 USB_PORT.MP3 | R0-7.2 4.84,42.9 | POL_PROTEC.2 5.4,43.46 R0-7.2 | 11.73,41.86 11.42,42.18 C5-2.1 10.81,42.18 9.91,43.08 9.91,46.63 10.92,47.65 11.38,47.65 | VREG_3V3.1 23.42,45.38 C5-3.1 23.06,46.6 20.78,48.89 +5V.2 | VREG_5V.1 11.66,45.38 C5-1.1 11.38,47.65 | 11.38,47.65 11.38,51.82 12.42,52.86 14.2,52.86 15.11,51.94 | 15.11,51.94 15.12,51.93 LED_5V_GRN.1 | LED_3V3_GRN.1 27.06,51.98 26.36,52.68 24.36,52.68 22.99,51.31 +5V.2 | +5V.2 20.78,51.99 19.54,53.23 16.4,53.23 15.11,51.94 | C1-3.1 28.32,28.18 C1-4.1 | R1-2.1 11.4,29.6 11.4,31.88 11.93,32.4 12.76,32.4 TVS_DIODE_ESD_P.1 | C1-2.1 19.06,36.86 C1-1.1 | 17.89,15.49 20.24,15.49 24.79,20.04 24.79,25.58 22.28,28.09 19.07,28.09 19.07,28.14 18.29,28.93 17.33,28.93 17.01,28.61 USB_INTERFACE.3 | 17.89,15.49 C6-1.1 | 32.64,2.18 33.8,1.02 39.62,1.02 | 39.62,1.02 42.16,1.02 43.5,2.35 UART_5V.4 | 91.25,25.59 95.42,21.42 IC1.38 95.42,13.38 87.88,5.84 | R1-4.1 10.56,23.92 11.48,24.84 11.48,27.74 R1-2.1 | BOOT_BTN.2 24.04,0.94 29.5,0.94 | 30.9,1.98 EN_BTN.2 | 10.82,4.95 14.89,0.89 21.42,0.89 BOOT_BTN.2 | C0-1.1 95.29,43.73 | UART_3V3.4 78.04,53.15 78.49,53.59 86.61,53.59 87.63,52.58 87.63,51.31 95.29,43.65 C0-1.1 | USB_INTERFACE.3 17.01,26.18 USB_INTERFACE.29 16.51,26.95 17.01,27.45 USB_INTERFACE.3 | USB_PORT.MP3 7.46,39.28 USB_PORT.A1 USB_PORT.B12 7.56,37.9
  Top 0.3: USB_PORT.MP3 USB_PORT.MP1 2.96,41.01 R0-7.2 | USB_PORT.MP4 USB_PORT.MP2 1.9,29.64 0.36,28.1 0.36,8.83 | USB_PORT.MP4 7.46,30.21 USB_PORT.A12 | 54.97,14.79 OLED.GND | 17.89,15.49 15.23,15.49 14.86,15.87 8.69,15.87 7.98,15.16 7.98,6.84
  Top 0.305: VREG_3V3_ALT.3 27.28,35.44 C5-5.1
  Top 0.406: 32.64,2.18 32.64,4.84 32.1,5.37 32.1,26.78 30.63,28.26 C1-4.1 | IC1.39 91.25,25.59 | IC1.39 87.92,25.69 87.88,25.65 | IC1.39 84.78,25.78 84.58,25.78 | IC1.39 84.62,28.92 84.58,28.96 | IC1.39 84.84,32.01 84.84,32.13 | IC1.39 87.92,32.17 88.01,32.26 | IC1.39 91,32 91.06,32 | v43.81,30.23 v57.53,30.23 | 46.33,41.96 46.28,41.91 45.21,41.91 45.26,41.96 46.33,41.96 | 48.87,41.96 50.11,41.96 50.16,41.91 48.92,41.91 48.87,41.96 | 46.33,49.58 46.28,49.53 45.09,49.53 45.14,49.58 46.33,49.58 | 48.87,49.58 48.95,49.66 50.16,49.66 50.09,49.58 48.87,49.58
  Top 0.508: USB_PORT.A1 8.59,38.1 8.61,38.08 | USB_PORT.A12 8.61,31.4 8.61,31.39 | OLED.CS/GND 39.8,14.76 39.8,16.13 39.78,16.11 OLED.CS/GND | OLED.CS/GND 38.23,14.73 | OLED.CS/GND 39.78,13.25 39.83,13.21 | 42.39,13.13 42.32,13.2 OLED.DC/GND 42.32,16.18 42.34,16.2 | OLED.GND 55.02,16.23 55.04,16.26 | OLED.GND 56.61,14.74 56.62,14.73 | OLED.GND 55.02,13.62 54.99,13.59
  Bottom 0.203: 46.13,13.79 46.13,15.37 | 48.67,15.49 48.67,14.17 | 51.21,13.72 51.21,15.44
  Bottom 0.3: 80.77,48.51 C7-6.1 79.5,48.51 78.04,49.97 UART_3V3.4 | C7-5.1 68.66,6.25 69.98,4.93 I2C_5V_2.4 71.94,1.27 | C7-3.1 82.78,6.25 83.92,5.11 I2C_3V3.4 | C7-4.1 55.09,6.25 56.77,4.58 I2C_5V_1.4 56.77,2.31 55.52,1.07 | C7-7.1 42.01,6.25 43.53,4.73 43.53,3.2 UART_5V.4 45.66,1.07 55.52,1.07 | +5V.2 26.47,51.31 28.55,53.39 30.89,53.39 32.72,51.56 +3V3.2 | I2C_3V3.4 81.96,1.27 71.94,1.27 | 55.52,1.07 71.73,1.07 71.94,1.27 | 87.88,5.84 85.27,3.23 I2C_3V3.4 | OLED.DC/GND 43.25,14.74 43.56,14.43 43.56,13.08 43.92,12.72 45.06,12.72 46.13,13.79 | 46.13,15.37 46.97,16.2 47.95,16.2 48.67,15.49 | 48.67,14.17 49.4,13.44 50.93,13.44 51.21,13.72
  Bottom 0.508: OLED.CS/GND 38.28,14.74 38.25,14.71 38.28,14.68 | OLED.DC/GND 42.32,13.28 | OLED.DC/GND 42.32,16.15 | OLED.CS/GND 39.75,14.71 39.75,13.28 | OLED.CS/GND 39.78,17.97 C3-1.2 | OLED.GND 55.02,17.25 C3-2.1 | OLED.GND 56.57,14.74 56.62,14.78 | OLED.GND 55.02,13.16 | MTR_DRVR_HOLE.12 46.33,43.56 v46.51,43.74 | MTR_DRVR_HOLE.12 46.33,40.89 v46.48,40.74 | MTR_DRVR_HOLE.12 MTR_DRVR_HOLE.13 | MTR_DRVR_HOLE.13 48.87,43.56 v49.05,43.74 | MTR_DRVR_HOLE.13 48.87,40.89 v49.02,40.74 | MTR_DRVR_HOLE.13 49.2,41.99 50.06,41.99 | MTR_DRVR_HOLE.12 45.19,42.32 | MTR_DRVR_HOLE.5 46.33,51.26 v46.48,51.41 | MTR_DRVR_HOLE.5 46.33,48.51 v46.43,48.41 | MTR_DRVR_HOLE.4 48.87,51.26 v49.02,51.41 | MTR_DRVR_HOLE.4 48.87,48.51 v48.97,48.41 | MTR_DRVR_HOLE.4 MTR_DRVR_HOLE.5 | MTR_DRVR_HOLE.5 45.19,49.94 | MTR_DRVR_HOLE.4 49.25,49.55 50.09,49.55 | +5V.2 20.78,48.63 C7-1.1 22.91,48.23 v23.01,48.34 | +3V3.2 32.72,48.98 C7-2.1 33.95,46.86 v34.14,46.86 | OLED.CS/GND OLED.DC/GND
  other vias: 50.29,39.47 50.29,40.74 49.02,39.47 47.75,40.74 47.75,39.47 46.48,39.47 45.21,39.47 45.21,40.74 50.32,43.74 50.32,45.01 49.05,45.01 47.78,45.01 47.78,43.74 46.51,45.01 45.24,45.01 45.24,43.74 50.24,47.14 50.24,48.41 48.97,47.14 47.7,47.14 47.7,48.41 46.43,47.14 45.16,48.41 45.16,47.14 50.29,51.41 50.29,52.68 49.02,52.68 47.75,51.41 47.75,52.68 46.48,52.68 45.21,51.41 45.21,52.68 89.41,27.43 89.41,28.96 89.41,30.48 87.88,30.48 86.36,30.48 86.36,28.96 87.88,28.96 87.88,27.43 86.36,27.43 17.27,26.57 17.27,24.79 15.75,24.79 15.75,26.57 85.04,10.54 73.79,8.59 81.66,16.38 55.88,7.19 90.04,21.97 87.76,17.4 10.77,35.05 89.48,5.87 56.97,17.12 23.11,37.97 2.92,36.86 2.92,32.41 21.03,6.22 29.49,6.27 16.66,47.88 28.7,33.55 23.11,32.92 11.15,47.6 26.29,14.73 12.7,37.82 18.26,22 47.68,24.05
  pour Top: -7.37,55.5 -7.37,-1.02 107.19,-1.02 107.19,55.5
  pour Bottom: -7.37,55.42 -7.37,-1.02 106.93,-1.02 106.93,55.42
GND_BAT
  Top 0.406: POL_PROTEC.3 4.57,46.05 2.48,43.97 BAT.2
LED_RX
  Top 0.3: USB_INTERFACE.18 16.51,22.5 16.15,22.15 9.98,22.15 9.2,22.94 9.2,24.43 7.95,25.68 R1-6.2
LED_TEST
  Top 0.3: IC1.24 77.64,18.36 76.05,16.76 69.17,16.76 68.49,17.44 R0-1.2
LED_TX
  Top 0.3: R1-5.2 8.7,21.54 16.46,21.54 17.01,22.09 USB_INTERFACE.19
MTCK
  Top 0.3: IC1.16 76.37,34.13 75.18,32.94 R7-1.2
MTDI
  Top 0.3: IC1.14 78.91,33.65 75.69,30.42 R7-2.2
MTDO  (via drill 0.65 pad 1.1)
  Top 0.3: IC1.23 76.37,21.17 v76.2,21.34 | v72.9,25.4 68.8,25.4 R7-4.2
  Bottom 0.3: v76.2,21.34 72.9,24.64 v72.9,25.4
MTMS
  Top 0.3: IC1.13 80.18,31.82 76.25,27.89 R7-3.2
MTR1_1,2EN
  Top 0.3: MTR_DRVR_HOLE.1 59.69,46.74 80.82,46.74 87.8,39.76 IC1.7
MTR1_1A
  Top 0.3: MTR_DRVR_HOLE.2 58.67,45.21 80.62,45.21 86.53,39.3 IC1.8
MTR1_2A
  Top 0.3: MTR_DRVR_HOLE.7 41.25,50.95 44.42,54.13 56.49,54.13 62.23,48.39 80.97,48.39 89.07,40.29 IC1.6
MTR1_OUT1Y
  Bottom 0.406: MTR_DRVR_HOLE.3 53.85,47.5 63.25,47.5 65.58,49.84 MTR1.1
MTR1_OUT2Y
  Bottom 0.406: MTR_DRVR_HOLE.6 43.79,53.06 44.73,54 60.68,54 MTR1.2
MTR2_3,4EN
  Top 0.3: MTR_DRVR_HOLE.9 38.71,41.48 44.68,35.51 60.78,35.51 65.43,40.16 80.44,40.16 82.72,37.88 IC1.11
MTR2_3A
  Top 0.3: MTR_DRVR_HOLE.10 41.25,41.27 45.67,36.85 60.17,36.85 65.28,41.96 80.39,41.96 83.99,38.36 IC1.10
MTR2_4A
  Top 0.3: MTR_DRVR_HOLE.15 55.27,41 59.03,41 61.52,43.48 80.59,43.48 85.26,38.82 IC1.9
MTR2_OUT3Y
  Bottom 0.406: MTR_DRVR_HOLE.11 43.79,38.25 44.7,37.34 63.5,37.34 72.59,46.43 MTR2.1
MTR2_OUT4Y
  Bottom 0.406: MTR2.2 70.05,49.23 65.28,44.45 53.85,44.45 51.71,42.32 MTR_DRVR_HOLE.14
N$2
  Top 0.3: R0-8.1 69.65,38.91 79.96,38.91 81.45,37.42 IC1.12
N$3
  Top 0.3: LED_TEST2_BLUE.2 68.47,35.89 R0-8.2
N$6
  Top 0.3: R7-1.1 64.53,32.94 JTAG.1
N$7
  Top 0.3: R5-2.2 25.19,51.02 LED_3V3_GRN.2
N$8
  Top 0.3: LED_5V_GRN.2 13.22,48.54 R5-1.2
N$10
  Top 0.3: R0-1.1 65.76,19.87 LED_TEST1_BLUE.2
N$11
  Top 0.3: R7-2.1 JTAG.2
N$13
  Top 0.305: VREG_3V3_ALT.4 31.02,34.25 R5-3.1
N$14
  Top 0.3: R7-3.1 JTAG.3
N$15
  Top 0.3: R7-4.1 JTAG.4
N$18
  Top 0.3: R6-1.1 14.97,8.21 Q1.B
N$19
  Top 0.3: R6-2.1 12.51,10.81 Q2.B
N$34
  Top 0.3: LVL_SHFT_N-MOSFET.1 37.93,8.64 R4-4.1 R4-5.2
N$35
  Top 0.3: R4-2.1 43.62,6.53 R4-3.2
N$38
  Top 0.3: IC1.35 91.67,19.36 R0-2.2
N$40
  Top 0.3: R1-5.1 LED_TX_GRN.1
N$41
  Top 0.3: R1-6.1 LED_RX_RED.1
RES
  Bottom 0.3: C3-1.1 R3-1.2 OLED.RES/RST
RSTB
  Top 0.3: R1-3.1 12.86,26.68 USB_INTERFACE.9
RTS_IN
  Top 0.3: USB_UART_IN.4 Q2.C 13.46,11.71 14.57,10.6 R6-1.2
RTS_OUT
  Top 0.3: USB_INTERFACE.24 19.55,25.18 20.22,24.51 20.22,21.95 18.57,20.3 4.29,20.3 2.29,18.29 USB_UART_OUT.1
RX_3V3
  Top 0.3: UART_3V3.2 83.12,50.28 91.61,41.79 IC1.4
RX_5V_A
  Top 0.3: IC1.26 80.18,16.43 77.9,14.15 66.62,14.15 63.75,11.28 39.85,11.28 LVL_SHFT_N-MOSFET.2
RX_5V_B
  Top 0.3: UART_5V.3 40.96,3.87 42.24,5.16 44.53,5.16 45.72,6.35 R4-1.2
RX_USB
  Top 0.3: USB_INTERFACE.26 20.96,26.18 22.78,24.36 22.78,20.9 19.68,17.8 7.57,17.8 6.15,16.38 6.15,11.33 4.75,9.93 USB_UART_OUT.3
RX_USB_IN  (via drill 0.65 pad 1.1)
  Top 0.3: v86.77,11.94 90.34,15.51 IC1.34
  Bottom 0.3: USB_UART_IN.2 14.45,9.63 22.86,18.03 32.26,18.03 35.05,20.83 59.44,20.83 68.33,11.94 v86.77,11.94
SCL_3V3  (via drill 0.65 pad 1.1)
  Top 0.3: I2C_3V3.3 81.38,3.86 82.77,5.25 R0-6.2 82.77,6.83 85.04,9.09 88.49,9.09 92.88,13.48 IC1.36 92.88,21.17 90.47,23.57 56.26,23.57 v49.4,16.71
  Bottom 0.3: v49.4,16.71 49.94,16.18 OLED.D0/SCL
SCL_5V  (via drill 0.65 pad 1.1)
  Top 0.3: I2C_5V_2.3 67.44,3.56 70.33,6.45 R0-4.2 70.61,6.75 70.61,9.67 | 70.61,9.67 69.62,8.69 v69.16,8.69 | 70.61,9.67 71.12,10.19 80.77,10.19 86.53,15.94 IC1.31 | v64.16,7.54 58.56,7.54 I2C_5V_1.3
  Bottom 0.3: v69.16,8.69 69.11,8.64 65.26,8.64 v64.16,7.54
SDA_3V3  (via drill 0.65 pad 1.1)
  Top 0.3: I2C_3V3.2 78.84,3.94 77.5,5.28 R0-5.2 77.5,7.8 78.61,8.91 81.41,8.91 89.07,16.58 IC1.33 89.07,20.66 86.75,22.97 63.36,22.97 60.96,20.57 60.96,13.97 59.83,12.84 v48.64,12.84 v48.64,12.85
  Bottom 0.3: v48.64,12.85 47.4,14.09 OLED.D1/SDA
SDA_5V
  Top 0.3: I2C_5V_2.2 64.9,5.18 63.81,6.27 R0-3.2 64.46,6.27 67.64,9.45 | IC1.30 85.26,16.38 80.29,11.41 69.6,11.41 67.64,9.45 | I2C_5V_1.2 51.69,5.12 55.42,8.86 67.02,8.86 67.61,9.45 67.64,9.45
SUSPENDB
  Top 0.3: R1-4.2 12.4,24.52 13.56,25.68 USB_INTERFACE.11
TX_3V3
  Top 0.3: UART_3V3.3 80.58,50.76 90.34,41 IC1.5
TX_5V_A
  Top 0.3: IC1.29 83.99,17.09 79.6,12.7 67.67,12.7 65.03,10.06 46.79,10.06 R4-1.1 44.82,9.9 42.91,9.9 R4-2.2
TX_5V_B
  Top 0.3: UART_5V.2 38.42,3.77 R4-5.1 35.31,6.34 34.29,7.37 34.29,9.91 34.54,10.15 R4-6.1
TX_USB
  Top 0.3: USB_INTERFACE.25 20.45,25.68 21.44,24.69 21.44,21.41 19.07,19.05 6.93,19.05 4.85,16.97 4.85,13.36 3.96,12.47 USB_UART_OUT.2
TX_USB_IN  (via drill 0.65 pad 1.1)
  Top 0.3: v90.27,13.21 91.67,14.61 R0-2.1
  Bottom 0.3: USB_UART_IN.3 13.69,12.17 21.34,19.81 31.75,19.81 34.29,22.35 59.69,22.35 68.83,13.21 v90.27,13.21
V_BAT
  Top 0.508: VREG_5V.3 14.34,40.78 14.24,40.68 11.66,40.68 11.41,40.42 C5-2.2 10.59,40.43 8.91,42.11 8.91,46.44 8.34,47.01 | BAT.1 2.81,47.01 POL_PROTEC.1 8.34,47.01 | 8.34,47.01 10.16,48.83 10.16,52.07 12.04,53.95 36.07,53.95 38.71,51.31 MTR_DRVR_HOLE.8
  Bottom 0.406: C2-4.2 38.75,49.98 MTR_DRVR_HOLE.8
VBUS_INT
  Top 0.3: USB_INTERFACE.8 12.63,28.71 R1-2.2 12.35,30.97 R1-1.2
VBUS_USB
  Top 0.3: USB_PORT.B4 7.64,32.32 | USB_PORT.B4 USB_PORT.A9 | USB_PORT.B4 7.35,32.38 | 6.83,37.16 7.33,37.16 USB_PORT.A4 USB_PORT.B9 7.65,37.19
  Top 0.406: R1-1.1 9.09,32.38 7.7,32.38 7.64,32.32 | 6.83,37.16 5,35.33 5,34.19 6.81,32.38 7.35,32.38 | 17.65,33.65 17.65,36.72 15.46,38.91 10.64,38.91 8.92,37.19 7.65,37.19 | 17.65,33.65 18.79,32.51 FUSE.2 | TVS_DIODE_ESD_P.2 17.27,34.03 17.65,33.65